# Altium PCB Sexy Rodent.PcbDoc (part 3 of 3)
Units mm, origin at the board's own origin, x right, y up, seen from the top; angles counter-clockwise.
Board outline 59.05 x 84.85 mm, 2 copper layers (Top Layer, Bottom Layer); 67 components, 41 nets, 178 pads, 206 vias.
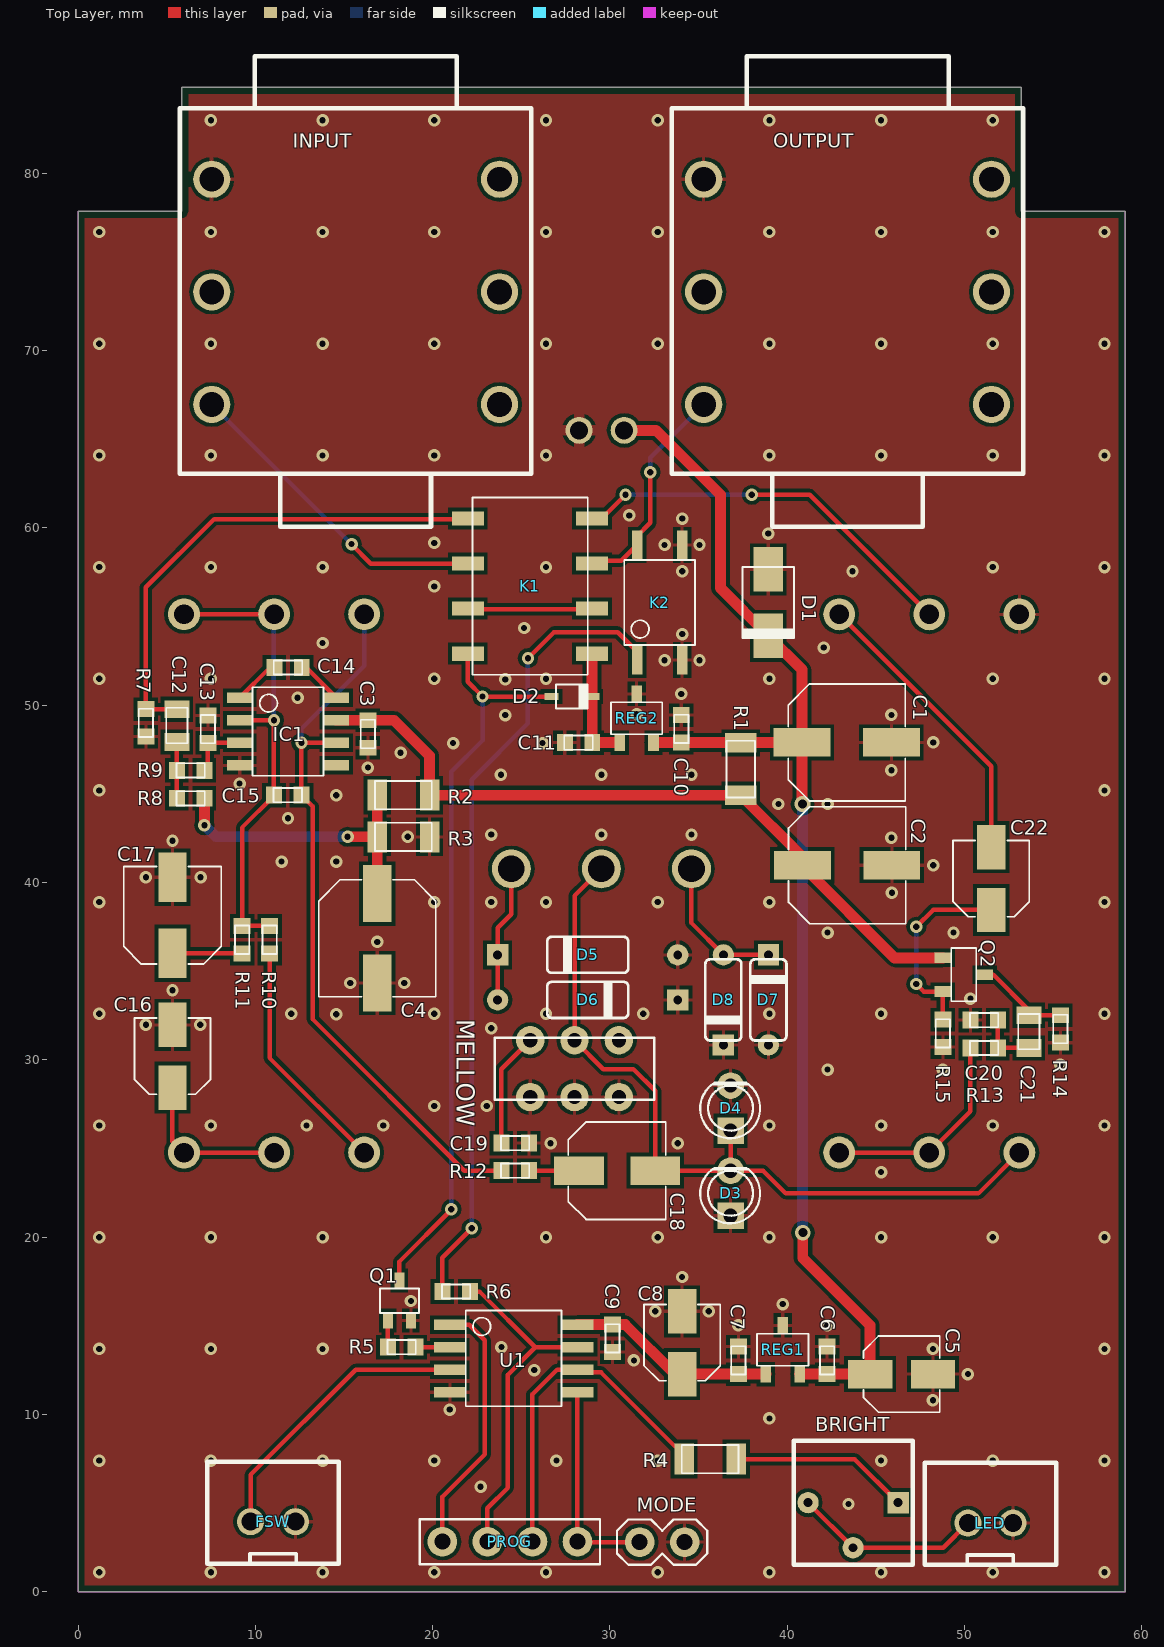
[diagram p0: Top Layer view]

## Via types
v1: diameter 0.7, hole 0.35, Top Layer to Bottom Layer, tented both sides, 146 vias
v2: diameter 0.7, hole 0.35, Top Layer to Bottom Layer, 58 vias
v3: diameter 0.889, hole 0.508, Top Layer to Bottom Layer, 2 vias

## Nets (pads, with @x,y where several pads share a name; then routed paths per layer and width w, separated by ;. In a path a pad name is that pad's centre, name@x,y a point inside that pad or via, vN(x,y) a via of type N, cw(c..) or ccw(c..) an arc to the next point about the centre after c; other vN are vias at no path point) (continued)
NetC15_2: (continued)
  Top Layer w0.254: GAIN.3 GAIN.2 ; IC1.2 v2(11.05,49.149) C15.2 11.05,44.898 9.25,43.098 R11.2 R10.2
  Bottom Layer w0.254: v2(11.05,49.149) 11.05,55.124 GAIN.2
NetC16_+: C16.+ SWEEP.2 SWEEP.3 | length 9
  Top Layer w0.254: C16.+ 5.327,25.419 SWEEP.3 SWEEP.2
NetC17_+: C17.+ R11.1 | length 3.9
  Top Layer w0.254: C17.+ 9.247,36.003 R11.1
NetC18_+: C18.+ R12.2 | length 2.8
  Top Layer w0.254: R12.2 C18.+
NetC18_-: C18.- D3.P$1 D4.ANODE MELLOW.A2 SW1.2 TONE.1 | length 44.8
  Top Layer w0.254: SW1.2 28,39.257 MELLOW.A2 29.625,29.475 31.325,29.475 32.547,28.253 C18.- 36.795,23.75 D3.P$1 ; D4.ANODE D3.P$1 ; TONE.1 50.78,22.464 39.911,22.464 38.63,23.745 D3.P$1
NetC19_1: C19.1 MELLOW.A1 | length 6.5
  Top Layer w0.254: C19.1 23.875,29.475 MELLOW.A1
NetC20_1: C20.1 C21.2 R13.2 | length 3.3
  Top Layer w0.254: C20.1 R13.2 C21.2
NetC21_1: C21.1 Q2.3 R14.2 | length 5.4
  Top Layer w0.254: Q2.3 51.625,34.8 53.625,32.8 C21.1 53.627,32.514 R14.2
NetC22_+: C22.+ Q2.2 R15.2 | length 11.1
  Top Layer w0.254: v2(47.275,34.275) 47.7,33.85 Q2.2 R15.2 ; v2(47.275,37.5) 48.225,38.45 C22.+
  Bottom Layer w0.254: v2(47.275,34.275) v2(47.275,37.5)
NetC22_-: C22.- VOL.3 | length 16.7
  Top Layer w0.254: VOL.3 51.5,46.549 C22.-
NetD2_2: D2.2 K1.8 Q1.3 | length 41.5
  Top Layer w0.254: Q1.3 18.125,18.625 21.05,21.55 v2(21.05,21.575) ; K1.8 21.986,51.314 v2(22.811,50.489) D2.2
  Bottom Layer w0.254: v2(21.05,21.575) 21.05,46.25 22.811,48.011 v2(22.811,50.489)
NetD5_C: D5.C D6.A SW1.3 | length 7.7
  Top Layer w0.254: D6.A D5.C 23.664,37.439 24.435,38.21 SW1.3
NetD7_C: D7.C D8.A SW1.1 | length 8.1
  Top Layer w0.254: SW1.1 34.595,37.718 D8.A D7.C
NetK1_2: K1.2 K1.7 | length 7
  Top Layer w0.254: K1.7@21.986,55.419 K1.2@28.986,55.419
NetK2_1: K2.1 R6.2 | length 45.4
  Top Layer w0.254: R6.2 20.545,18.845 v2(22.2,20.5) ; v2(25.374,52.649) 26.839,54.114 30.435,54.114 31.53,53.019 K2.1
  Bottom Layer w0.254: v2(22.2,20.5) 22.2,45.8 25.374,48.974 v2(25.374,52.649)
NetQ1_1: Q1.1 R5.2 | length 1.5
  Top Layer w0.254: R5.2 Q1.1
NetR10_1: R10.1 SWEEP.1 | length 13.4
  Top Layer w0.254: R10.1 10.8,30.105 SWEEP.1
NetR13_1: R13.1 TONE.2 TONE.3 | length 11.9
  Top Layer w0.254: TONE.3 TONE.2 50.325,27.089 R13.1
OUTPUT: K1.3 K2.6 OUTPUT.T | length 12.5
  Top Layer w0.254: K1.3 29.152,58.15 30.641,58.15 K2.6 31.53,59.539 32.275,60.284 v2(32.275,63.142)
  Bottom Layer w0.254: v2(32.275,63.142) 32.275,63.95 OUTPUT.T
PB0: MODE.2 PROG.4 U1.5 | length 11.9
  Top Layer w0.254: U1.5 PROG.4 28.192,2.799 MODE.2
PB1: PROG.3 R4.1 U1.6 | length 19.6
  Top Layer w0.254: PROG.3 25.627,11.139 27.012,12.524 U1.6 28.321,12.37 29.494,12.37 34.176,7.688 R4.1
PB2: PROG.2 R6.1 U1.7 | length 19.5
  Top Layer w0.254: R6.1 22.643,16.932 25.781,13.794 ; PROG.2 23.087,4.712 24.245,5.87 24.245,12.245 25.787,13.788 25.781,13.794 ; 25.775,13.794 25.781,13.794 ; U1.7 25.781,13.794
PB3: R5.1 U1.2 | length 1.9
  Top Layer w0.254: R5.1 19.031,13.794 U1.2
PB4: FSW.1 U1.3 | length 16.3
  Top Layer w0.254: FSW.1 9.727,6.591 15.66,12.524 U1.3
PB5: PROG.1 U1.1 | length 14.7
  Top Layer w0.254: PROG.1 20.547,5.347 22.945,7.745 22.945,14.18 22.061,15.064 U1.1
RETURN: K1.4 VOL.2 | length 22.2
  Top Layer w0.254: K1.4@29.185,60.524 29.535,60.524 v2(30.875,61.864) ; v2(38,61.864) 41.265,61.864 VOL.2
  Bottom Layer w0.254: v2(30.875,61.864) v2(38,61.864)
SEND: C12.2 K1.5 R7.2 | length 28.4
  Top Layer w0.254: C12.2 R7.2 3.825,56.65 7.674,60.499 K1.5@21.986,60.499
Vb: C4.+ R2.2 R3.2 R8.2 | length 17.1
  Top Layer w0.61: v2(7.125,43.225) R8.2 ; v2(15.2,42.575) R3.2 ; C4.+ R3.2 ; R2.2 R3.2
  Bottom Layer w0.61: v2(7.125,43.225) 7.775,42.575 v2(15.2,42.575)
Vr: C2.+ C3.1 IC1.7 Q2.1 R1.2 R2.1 | length 41.4
  Top Layer w0.254: C3.1 C3.1
  Top Layer w0.61: IC1.7 C3.1 ; C3.1 17.825,49.15 19.825,47.15 R2.1 R1.2 40.854,41.446 C2.+ 40.854,40.946 46.05,35.75 Q2.1
pads on no net: IC1.5 INPUT.R INPUT.RN INPUT.SN INPUT.TN MELLOW.A3 OUTPUT.R OUTPUT.RN OUTPUT.SN OUTPUT.TN

## Polygon pours and split planes (outlines as drawn)
GND on Bottom Layer "GND_L02_P008" (solid, pour order 8): 0,-1.011 59.055,-1.011 59.055,77.729 59.182,77.856 53.204,77.856 53.204,84.841 5.842,84.841 5.842,77.856 0,77.856
GND on Top Layer "GND_L01_P010" (solid, pour order 10): 0,-1.011 59.055,-1.011 59.055,77.856 53.204,77.856 53.204,84.841 5.842,84.841 5.842,77.856 0,77.856

## Keep-outs
Keep-Out Layer:
  the board outline again, w0.025

## Silkscreen, mask and mechanical layers (free items; w line width, h text height)
Mechanical 3:
  lines w2: -1,7.32 -1,-0.011 ; -1,13.645 -1,64.242 ; -1,70.591 -1,77.856 ; 60.055,7.315 60.055,-0.011 ; 60.055,13.645 60.055,64.242 ; 60.055,70.571 60.055,77.856 ; -1,-0.011 ccw(c0,-0.011) 0,-1.011 ; -1,-0.011 ccw(c0,-0.011) 0,-1.011 ; -1,77.856 cw(c0,77.856) 0,78.856 ; -1,77.856 cw(c0,77.856) 0,78.856 ; 0,-1.011 59.055,-1.011 ; 0,78.856 4.842,78.856 4.842,84.841 ; 4.842,84.841 cw(c5.842,84.841) 5.842,85.841 ; 4.842,84.841 cw(c5.842,84.841) 5.842,85.841 ; 5.842,85.841 53.204,85.841 ; 53.204,85.841 cw(c53.204,84.841) 54.204,84.841 ; 53.204,85.841 cw(c53.204,84.841) 54.204,84.841 ; 54.204,84.841 54.204,78.856 59.055,78.856 ; 59.055,-1.011 ccw(c59.055,-0.011) 60.055,-0.011 ; 59.055,-1.011 ccw(c59.055,-0.011) 60.055,-0.011 ; 59.055,78.856 cw(c59.055,77.856) 60.055,77.856 ; 59.055,78.856 cw(c59.055,77.856) 60.055,77.856
Route Tool Path:
  lines w2: -1,7.32 -1,-0.011 ; -1,13.645 -1,64.242 ; -1,70.591 -1,77.856 ; 60.055,7.315 60.055,-0.011 ; 60.055,13.645 60.055,64.242 ; 60.055,70.571 60.055,77.856 ; -1,-0.011 ccw(c0,-0.011) 0,-1.011 ; -1,-0.011 ccw(c0,-0.011) 0,-1.011 ; -1,77.856 cw(c0,77.856) 0,78.856 ; -1,77.856 cw(c0,77.856) 0,78.856 ; 0,-1.011 59.055,-1.011 ; 0,78.856 4.842,78.856 4.842,84.841 ; 4.842,84.841 cw(c5.842,84.841) 5.842,85.841 ; 4.842,84.841 cw(c5.842,84.841) 5.842,85.841 ; 5.842,85.841 53.204,85.841 ; 53.204,85.841 cw(c53.204,84.841) 54.204,84.841 ; 53.204,85.841 cw(c53.204,84.841) 54.204,84.841 ; 54.204,84.841 54.204,78.856 59.055,78.856 ; 59.055,-1.011 ccw(c59.055,-0.011) 60.055,-0.011 ; 59.055,-1.011 ccw(c59.055,-0.011) 60.055,-0.011 ; 59.055,78.856 cw(c59.055,77.856) 60.055,77.856 ; 59.055,78.856 cw(c59.055,77.856) 60.055,77.856